# EAGLE board CS8412_TDA1543 (EAGLE 9.6.2)
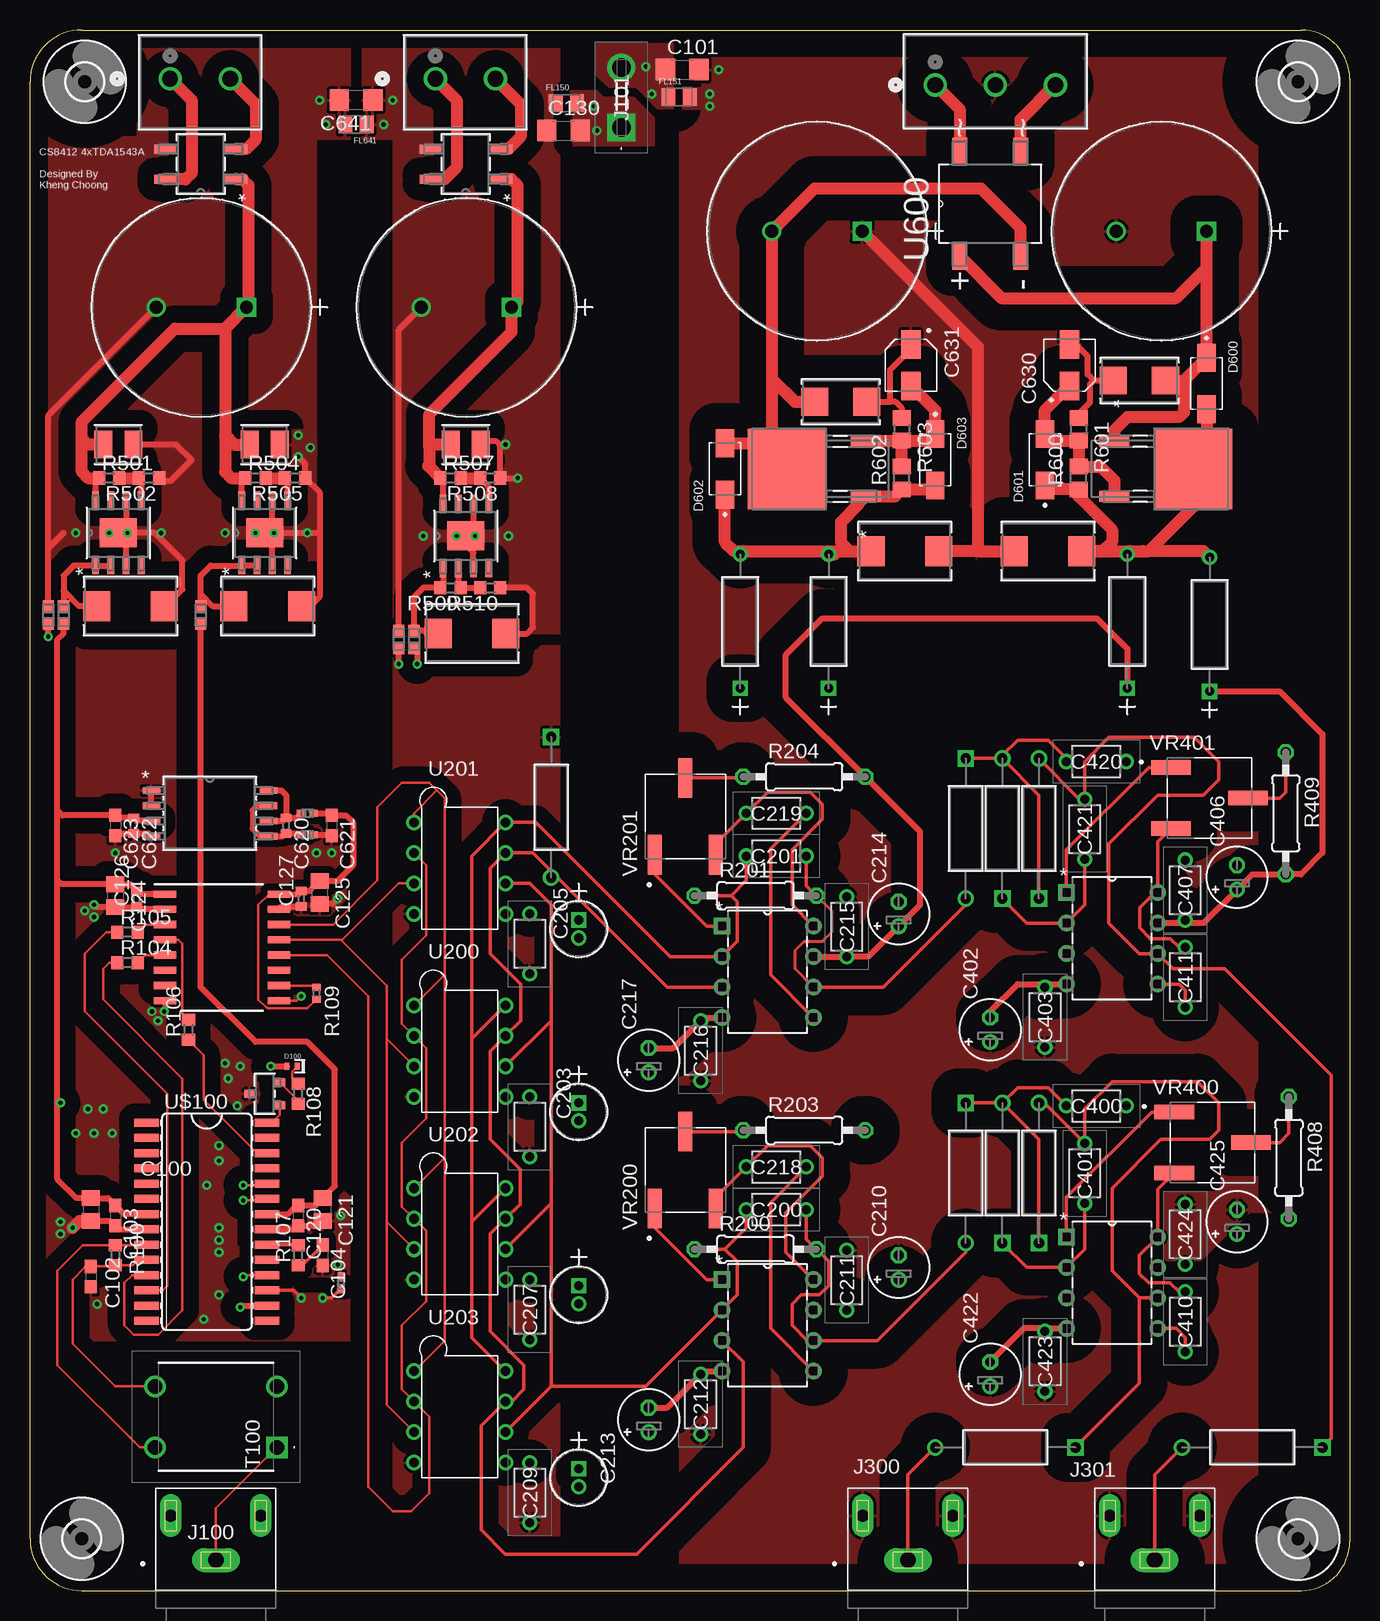
[diagram p0: board, top side]
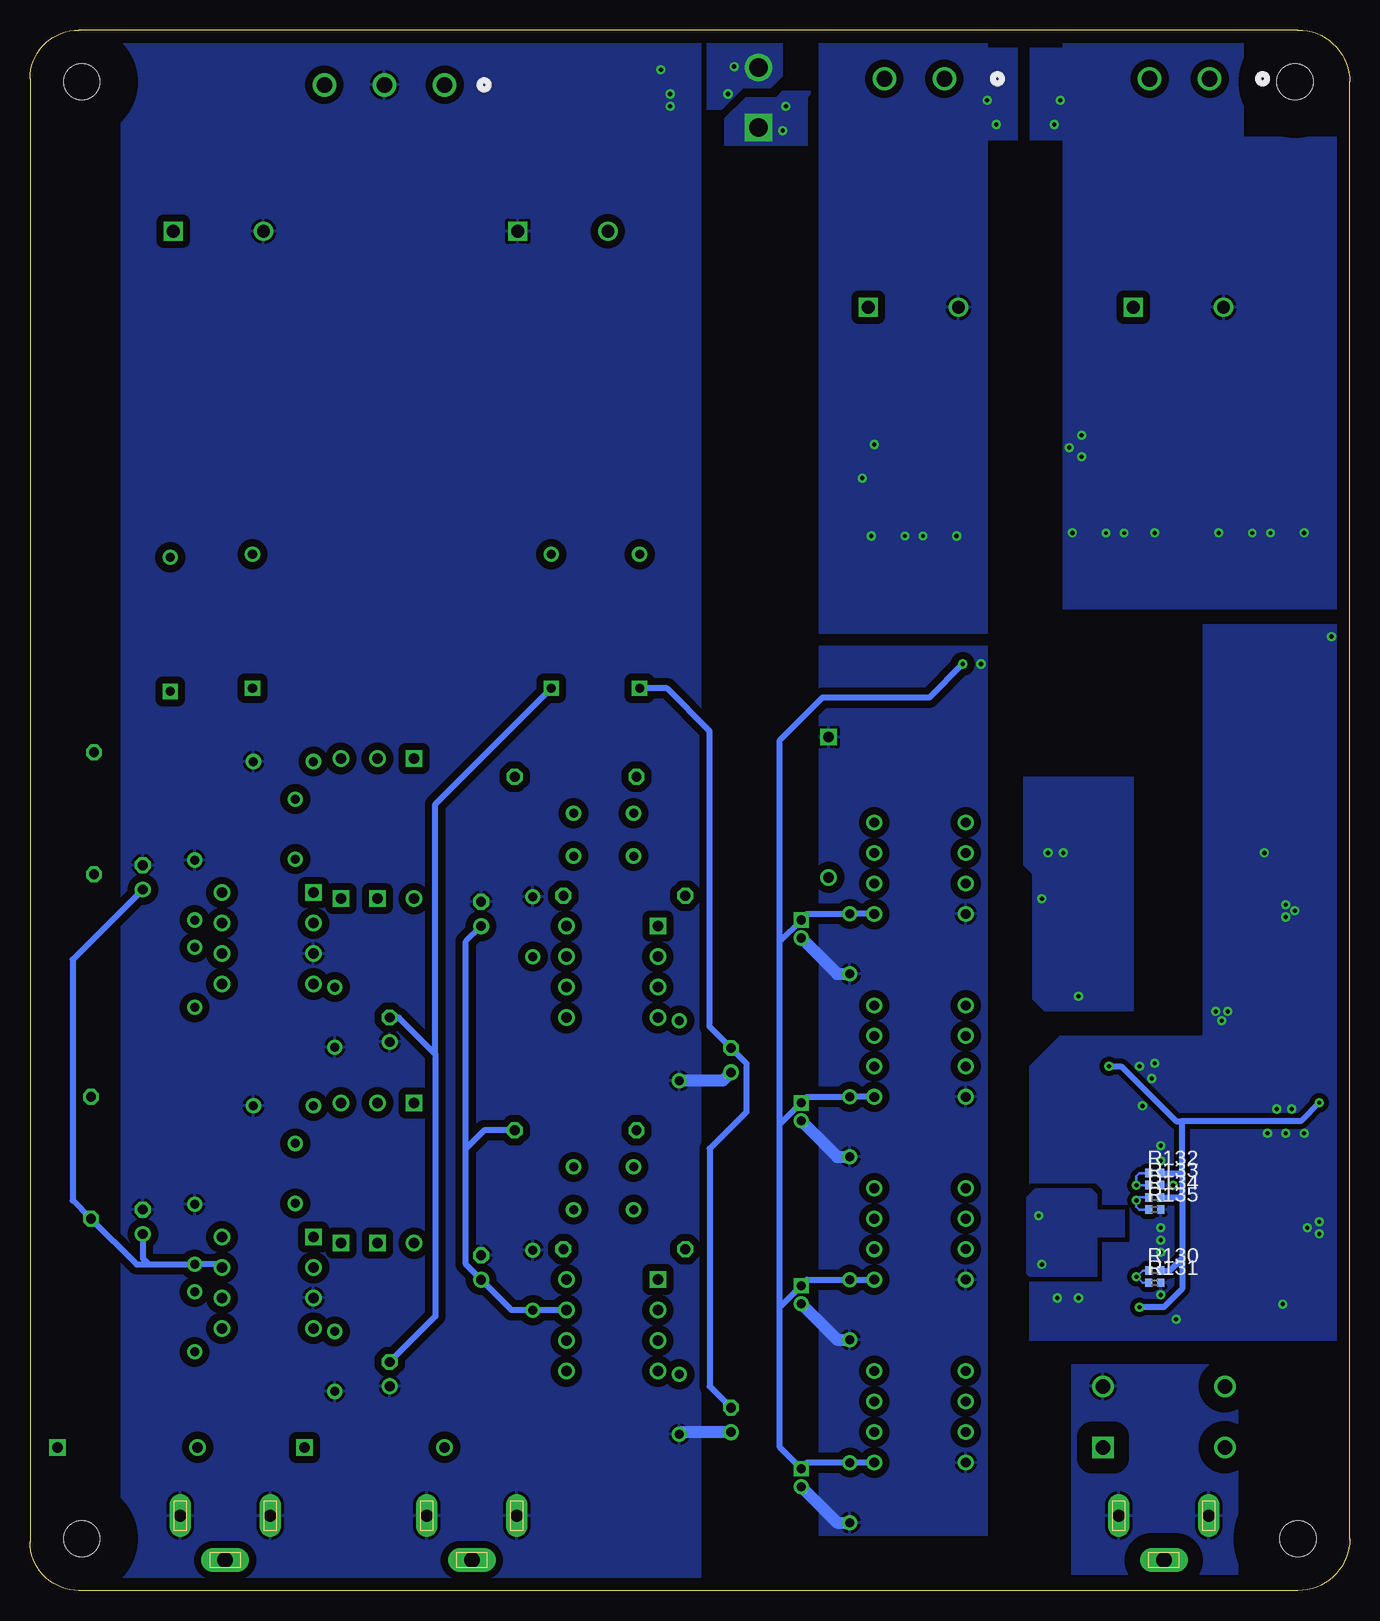
[diagram p1: board, bottom side, seen from below]

Size 109.98 x 130.05 mm. Coordinates in mm from the lower left corner, seen from the top.
Outline: 0,4.32 arc90 4.32,0 105.92,0 arc90 109.98,4.06 109.98,125.98 arc90 105.92,130.05 4.32,130.05 arc90 0,125.73 0,4.32
Copper layers (1*16): Top 0.035mm / dielectric 1.5mm / Bottom 0.035mm
Design rules "default *": minimum track width 6mil, minimum drill 0.35mm, track to track 6mil, track to pad 6mil, pad to pad 6mil, via to via 6mil, smd to smd 6mil, copper to edge 40mil, drill to drill 6mil, minimum pad ring 10mil, minimum via ring 8mil, stop-mask expansion 4mil, vias tented up to drill 13mil, thermal gap 10mil
Net classes: 1 Diff_Pair: width 0.406 mm

## Footprints (pad centres in the part's own frame; a part is rotated, then mirrored left to right if it is on the bottom)
C0805 = smd 1.3 x 1.5: 1 -0.95,0; 2 0.95,0
C1206 = smd 1.6 x 1.8: 1 -1.4,0; 2 1.4,0
C0603 = smd 1.1 x 1: 1 -0.85,0; 2 0.85,0
C0402 = smd 0.7 x 0.9: 1 -0.65,0; 2 0.65,0
K104K15X7RF5TH5 = drill 0.75 pad 1.2: 1 0,0; 2 5,0
CAP_PAN_4X7_PAN = drill 0.762 pad 1.27 square: 1 0,0 | drill 0.762 pad 1.27: 2 1.499,0
E2-5 = drill 0.813 pad 1.27: + -1.016,0 | drill 0.813 pad 1.27 octagon: - 1.016,0
PCAP_18X355_PAN = drill 1.067 pad 1.524 square: 1 0,0 | drill 1.067 pad 1.524: 2 7.518,0
CAP_293D-B_VSS = smd 1.498 x 2.311: 1 -1.258,0; 2 1.258,0
CAP_7343-43_TR3 = smd 2.261 x 2.489: 1 -2.819,0; 2 2.819,0
CAP_293D-C_VSS = smd 2.261 x 2.311: 1 -2.172,0; 2 2.172,0
CAPAE430X550N = smd 2.36 x 1.62: 1 -1.725,0; 2 1.725,0
0402(POL) = smd 0.399 x 0.6: 1 -0.435,0; 2 0.435,0
DIOM5226X220N = smd 2.31 x 1.54: 1 -2.145,0; 2 2.145,0
BEADC2012X105N = smd 1.14 x 1.47: 1 -0.89,0; 2 0.89,0
3,0 = hole 3: 0,0
SWITCHCRAFT_PJRAN1X1U01X = drill 1.3 pad 2 long: 1 0,0 | drill 1 pad 1.8 long: 2 -3.75,3.7; 3 3.75,3.7
23765952 = drill 1.55 pad 2.325 square: 1 0,0 | drill 1.55 pad 2.325: 2 5,0
CONN2_710002_WRE = drill 1.295 pad 1.803: 1 0,0; 2 5.004,0
CONN3_WR-TBL-1377_WRE = drill 1.295 pad 1.803: 1 0,0; 2 5.004,0; 3 10.008,0
IND_BLM15_0402_MUR = smd 0.711 x 0.559: 1 -0.521,0; 2 0.521,0
IND_BLM18_0603_MUR = smd 0.965 x 0.94: 1 -0.749,0; 2 0.749,0
IND_BOURNS_78F = drill 0.762 pad 1.27 square: 1 0,0 | drill 0.762 pad 1.27: 2 11.176,0
R0603 = smd 1 x 1.1: 1 -0.85,0; 2 0.85,0
R0402 = smd 0.6 x 0.7: 1 -0.5,0; 2 0.5,0
0207/10 = drill 0.813 octagon: 1 -5.08,0; 2 5.08,0
YAG_MF25_YAG = drill 0.864 pad 1.372 square: 1 0,0 | drill 0.864 pad 1.372: 2 11.684,0
R0805 = smd 1.3 x 1.5: 1 -0.95,0; 2 0.95,0
DA102C = drill 1.2 pad 1.8 square: 1 0,0 | drill 1.2 pad 1.8: 3 0,-5.08; 4 10.16,-5.08; 6 10.16,0
DW0016B_N = smd 1.9 x 0.6: 1 -4.75,4.445; 2 -4.75,3.175; 3 -4.75,1.905; 4 -4.75,0.635; 5 -4.75,-0.635; 6 -4.75,-1.905; 7 -4.75,-3.175; 8 -4.75,-4.445; 9 4.75,-4.445; 10 4.75,-3.175; 11 4.75,-1.905; 12 4.75,-0.635; 13 4.75,0.635; 14 4.75,1.905; 15 4.75,3.175; 16 4.75,4.445
SOT_BT3906_ONS = smd 0.66 x 0.914: 1 -0.95,-1.245; 2 0.95,-1.245; 3 0,1.245
DIP-8(300MIL)(2.54MM) = drill 0.8: 1 -3.81,-3.81; 2 -1.27,-3.81; 3 1.27,-3.81; 4 3.81,-3.81; 5 3.81,3.81; 6 1.27,3.81; 7 -1.27,3.81; 8 -3.81,3.81
P8 = drill 0.864 pad 1.372 square: 1 -7.62,7.62 | drill 0.864 pad 1.372: 2 -7.62,5.08; 3 -7.62,2.54; 4 -7.62,0; 5 0,0; 6 0,2.54; 7 0,5.08; 8 0,7.62
TO-269AA_3P8X4P75_DIO = smd 1.803 x 0.762: 1 -2.959,1.25; 2 -2.959,-1.25; 3 2.959,-1.25; 4 2.959,1.25
RD_8_2_ADI = smd 1.46 x 0.559: 1 -2.724,1.905; 2 -2.724,0.635; 3 -2.724,-0.635; 4 -2.724,-1.905; 5 2.724,-1.905; 6 2.724,-0.635; 7 2.724,0.635; 8 2.724,1.905 | smd 2.413 x 3.099: EPAD 0,0
SOT508P985X260-4N = smd 2.235 x 1.245: 1 -4.394,2.54; 2 -4.394,-2.54; 3 4.394,-2.54; 4 4.394,2.54
KVU3 = smd 0.94 x 2.489: 1 -2.286,-6.413; 3 2.286,-6.413 | smd 6.706 x 6.528: 2 0,0.152
RI_8_1_ADI = smd 1.461 x 0.561: 1 -4.88,1.905; 2 -4.88,0.635; 3 -4.88,-0.635; 4 -4.88,-1.905; 5 4.88,-1.905; 6 4.88,-0.635; 7 4.88,0.635; 8 4.88,1.905
SO28L = smd 0.66 x 2.032: 1 -8.255,-5.029; 2 -6.985,-5.029; 3 -5.715,-5.029; 4 -4.445,-5.029; 5 -3.175,-5.029; 6 -1.905,-5.029; 7 -0.635,-5.029; 8 0.635,-5.029; 9 1.905,-5.029; 10 3.175,-5.029; 11 4.445,-5.029; 12 5.715,-5.029; 13 6.985,-5.029; 14 8.255,-5.029; 15 8.255,5.029; 16 6.985,5.029; 17 5.715,5.029; 18 4.445,5.029; 19 3.175,5.029; 20 1.905,5.029; 21 0.635,5.029; 22 -0.635,5.029; 23 -1.905,5.029; 24 -3.175,5.029; 25 -4.445,5.029; 26 -5.715,5.029; 27 -6.985,5.029; 28 -8.255,5.029
TRIM_3361P-1-104GLF = smd 3.3 x 1.19: 1 -3.2,2.54; 2 3.2,0; 3 -3.2,-2.54

## Placement (x,y rotation side)
C100  10uF  [C0805]  5.08,31.75 270 top
C101  [C1206]  54.36,126.75 0 top
C102  10nF  [C0603]  5.08,26.16 270 top
C103  0.1uF  [C0603]  7.11,31.24 270 top
C104  47nF  [C0603]  24.38,27.94 270 top
C120  0.1uF  [C0603]  22.35,31.24 270 top
C121  10uF  [C0805]  24.38,31.75 270 top
C124  10uF  [C0805]  7.11,57.91 270 top
C125  10uF  [C0805]  24.13,58.17 270 top
C126  CC0402KRX7R8BB104  [C0402]  8.89,57.66 90 top
C127  CC0402KRX7R8BB104  [C0402]  22.61,57.66 90 top
C130  [C1206]  44.45,121.67 0 top
C200  K104K15X7RF5TH5  [K104K15X7RF5TH5]  59.69,31.75 0 top
C201  K104K15X7RF5TH5  [K104K15X7RF5TH5]  59.69,61.21 0 top
C202  EEAGA1C100H  [CAP_PAN_4X7_PAN]  45.72,40.64 270 top
C203  K104K15X7RF5TH5  [K104K15X7RF5TH5]  41.66,41.15 270 top
C204  EEAGA1C100H  [CAP_PAN_4X7_PAN]  45.72,55.88 270 top
C205  K104K15X7RF5TH5  [K104K15X7RF5TH5]  41.66,56.39 270 top
C206  EEAGA1C100H  [CAP_PAN_4X7_PAN]  45.72,10.16 270 top
C207  K104K15X7RF5TH5  [K104K15X7RF5TH5]  41.66,25.91 270 top
C208  EEAGA1C100H  [CAP_PAN_4X7_PAN]  45.72,25.4 270 top
C209  K104K15X7RF5TH5  [K104K15X7RF5TH5]  41.66,10.67 270 top
C210  860020572003  [E2-5]  72.39,26.92 90 top
C211  K104K15X7RF5TH5  [K104K15X7RF5TH5]  68.07,23.37 90 top
C212  K104K15X7RF5TH5  [K104K15X7RF5TH5]  55.88,18.03 270 top
C213  860020572003  [E2-5]  51.56,14.22 90 top
C214  860020572003  [E2-5]  72.39,56.39 90 top
C215  K104K15X7RF5TH5  [K104K15X7RF5TH5]  68.07,52.83 90 top
C216  K104K15X7RF5TH5  [K104K15X7RF5TH5]  55.88,47.5 270 top
C217  860020572003  [E2-5]  51.56,44.2 90 top
C218  K104K15X7RF5TH5  [K104K15X7RF5TH5]  59.69,35.31 0 top
C219  K104K15X7RF5TH5  [K104K15X7RF5TH5]  59.69,64.77 0 top
C400  K104K15X7RF5TH5  [K104K15X7RF5TH5]  86.36,40.39 0 top
C401  K104K15X7RF5TH5  [K104K15X7RF5TH5]  87.88,32.26 90 top
C402  860020572003  [E2-5]  80.01,46.74 90 top
C403  K104K15X7RF5TH5  [K104K15X7RF5TH5]  84.58,50.29 270 top
C406  860020572003  [E2-5]  100.58,59.44 90 top
C407  K104K15X7RF5TH5  [K104K15X7RF5TH5]  96.27,55.88 90 top
C410  K104K15X7RF5TH5  [K104K15X7RF5TH5]  96.27,24.89 270 top
C411  K104K15X7RF5TH5  [K104K15X7RF5TH5]  96.27,53.59 270 top
C420  K104K15X7RF5TH5  [K104K15X7RF5TH5]  86.36,69.09 0 top
C421  K104K15X7RF5TH5  [K104K15X7RF5TH5]  87.88,60.96 90 top
C422  860020572003  [E2-5]  80.01,18.03 90 top
C423  K104K15X7RF5TH5  [K104K15X7RF5TH5]  84.58,21.59 270 top
C424  K104K15X7RF5TH5  [K104K15X7RF5TH5]  96.27,27.18 90 top
C425  860020572003  [E2-5]  100.58,30.73 90 top
C500  ECA-1VM472  [PCAP_18X355_PAN]  18.03,106.93 180 top
C501  293D225X0035B2TE3  [CAP_293D-B_VSS]  19.56,95.5 0 top
C503  TR3E226K035C0200  [CAP_7343-43_TR3]  8.38,82.04 0 top
C504  293D225X0035B2TE3  [CAP_293D-B_VSS]  7.37,95.5 0 top
C505  TR3E226K035C0200  [CAP_7343-43_TR3]  19.81,82.04 0 top
C506  ECA-1VM472  [PCAP_18X355_PAN]  40.13,106.93 180 top
C507  293D225X0035B2TE3  [CAP_293D-B_VSS]  36.32,95.5 0 top
C508  TR3E226K035C0200  [CAP_7343-43_TR3]  36.83,79.76 0 top
C600  ECA-1HM332  [PCAP_18X355_PAN]  98.04,113.28 180 top
C601  ECA-1HM332  [PCAP_18X355_PAN]  69.34,113.28 180 top
C602  293D225X0050C2TE3  [CAP_293D-C_VSS]  92.46,100.84 180 top
C603  293D225X0050C2TE3  [CAP_293D-C_VSS]  67.56,99.06 180 top
C604  TR3E226K035C0200  [CAP_7343-43_TR3]  84.84,86.61 180 top
C605  TR3E226K035C0200  [CAP_7343-43_TR3]  72.9,86.61 180 top
C620  0.1uF  [C0402]  21.34,63.75 270 top
C621  10uF  [C0603]  25.15,63.75 270 top
C622  0.1uF  [C0402]  8.64,63.75 270 top
C623  10uF  [C0603]  7.11,63.75 270 top
C630  UWT1C100MCL1GB  [CAPAE430X550N]  86.61,102.11 90 top
C631  UWT1C100MCL1GB  [CAPAE430X550N]  73.41,102.11 270 top
C641  [C1206]  27.18,124.21 180 top
D100  LTST-C281KRKT  [0402(POL)]  21.84,43.69 180 top
D600  MRA4007T3G  [DIOM5226X220N]  98.04,100.58 270 top
D601  MRA4007T3G  [DIOM5226X220N]  84.58,94.23 90 top
D602  MRA4007T3G  [DIOM5226X220N]  57.91,93.47 90 top
D603  MRA4007T3G  [DIOM5226X220N]  75.44,94.23 270 top
FL150  BLM21PG121SN1D  [BEADC2012X105N]  44.7,123.95 0 top
FL151  BLM21PG121SN1D  [BEADC2012X105N]  54.1,124.46 0 top
FL641  BLM21PG121SN1D  [BEADC2012X105N]  27.18,122.17 180 top
H100  MOUNT-HOLE3.0  [3,0]  105.66,4.32 0 top
H101  MOUNT-HOLE3.0  [3,0]  4.32,4.32 0 top
H102  MOUNT-HOLE3.0  [3,0]  105.66,125.73 0 top
H103  MOUNT-HOLE3.0  [3,0]  4.57,125.73 0 top
J100  PJRAN1X1U01X  [SWITCHCRAFT_PJRAN1X1U01X]  15.49,2.54 0 top
J101  2376595-2  [23765952]  49.28,121.92 90 top
J300  PJRAN1X1U01X  [SWITCHCRAFT_PJRAN1X1U01X]  73.15,2.54 0 top
J301  PJRAN1X1U01X  [SWITCHCRAFT_PJRAN1X1U01X]  93.73,2.54 0 top
J500  691137710002  [CONN2_710002_WRE]  11.68,125.98 0 top
J501  691137710002  [CONN2_710002_WRE]  33.78,125.98 0 top
J600  691137710003  [CONN3_WR-TBL-1377_WRE]  75.44,125.48 0 top
L103  BLM15AG700SN1D  [IND_BLM15_0402_MUR]  25.91,25.65 90 top
L500  BLM18PG121SN1D  [IND_BLM18_0603_MUR]  2.79,81.28 90 top
L501  BLM18PG121SN1D  [IND_BLM18_0603_MUR]  14.22,81.28 90 top
L502  BLM18PG121SN1D  [IND_BLM18_0603_MUR]  32,79.25 90 top
L503  BLM18PG121SN1D  [IND_BLM18_0603_MUR]  1.52,81.28 90 top
L504  BLM18PG121SN1D  [IND_BLM18_0603_MUR]  30.73,79.25 90 top
L600  78F1R0K-RC  [IND_BOURNS_78F]  98.3,74.93 90 top
L601  78F1R0K-RC  [IND_BOURNS_78F]  91.44,75.18 90 top
L602  BLM15HD182SN1D  [IND_BLM15_0402_MUR]  23.11,64.77 0 top
L603  BLM15HD182SN1D  [IND_BLM15_0402_MUR]  23.11,62.99 0 top
L605  78F1R0K-RC  [IND_BOURNS_78F]  66.55,75.18 90 top
L606  78F1R0K-RC  [IND_BOURNS_78F]  59.18,75.18 90 top
R100  75R  [R0603]  7.11,27.94 90 top
R104  22R  [R0603]  8.13,52.32 0 top
R105  22R  [R0603]  8.13,54.86 0 top
R106  22R  [R0603]  13.21,46.74 90 top
R107  1K  [R0603]  22.35,27.94 90 top
R108  680R  [R0603]  22.35,41.4 270 top
R109  1K  [R0402]  23.88,49.78 270 top
R130  0R  [R0402]  16.26,26.67 0 bottom
R131  0R  [R0402]  16.26,25.65 0 bottom
R132  0R  [R0402]  16.26,34.8 0 bottom
R133  0R  [R0402]  16.26,33.78 0 bottom
R134  0R  [R0402]  16.26,32.77 0 bottom
R135  0R  [R0402]  16.26,31.75 0 bottom
R200  1K5  [0207/10]  60.45,28.45 0 top
R201  1K5  [0207/10]  60.45,57.91 0 top
R202  MFP-25BRD52-10K  [YAG_MF25_YAG]  43.43,71.12 270 top
R203  20K  [0207/10]  64.52,38.35 0 top
R204  20K  [0207/10]  64.52,67.82 0 top
R400  MFP-25BRD52-10K  [YAG_MF25_YAG]  77.98,40.64 270 top
R401  MFP-25BRD52-10K  [YAG_MF25_YAG]  81.03,28.96 90 top
R402  MFP-25BRD52-10K  [YAG_MF25_YAG]  84.07,28.96 90 top
R403  MFP-25BRD52-10K  [YAG_MF25_YAG]  87.12,11.94 180 top
R407  MFP-25BRD52-10K  [YAG_MF25_YAG]  107.7,11.94 180 top
R408  20K  [0207/10]  104.9,36.07 270 top
R409  20K  [0207/10]  104.65,64.77 270 top
R411  MFP-25BRD52-10K  [YAG_MF25_YAG]  77.98,69.34 270 top
R412  MFP-25BRD52-10K  [YAG_MF25_YAG]  81.03,57.66 90 top
R413  MFP-25BRD52-10K  [YAG_MF25_YAG]  84.07,57.66 90 top
R501  100k  [R0603]  6.6,92.71 0 top
R502  100k  [R0603]  9.91,92.71 180 top
R504  100k  [R0603]  18.8,92.71 0 top
R505  100k  [R0603]  22.1,92.71 180 top
R507  100k  [R0603]  35.05,92.71 0 top
R508  100k  [R0603]  38.35,92.71 180 top
R509  100k  [R0603]  35.05,83.57 180 top
R510  100k  [R0603]  38.35,83.57 180 top
R600  RC0805FR-07240RL  [R0805]  87.38,92.71 90 top
R601  RC0805FR-072K05L  [R0805]  87.38,96.77 270 top
R602  RC0805FR-07120RL  [R0805]  72.64,92.71 90 top
R603  RC0805FR-071K02L  [R0805]  72.64,96.77 270 top
T100  DA102C  [DA102C]  20.57,11.94 180 top
U1  ISO7740FDWR  [DW0016B_N]  16,53.59 0 top
U101  MMBT3906  [SOT_BT3906_ONS]  19.56,41.4 90 top
U200  TDA1543  [DIP-8(300MIL)(2.54MM)]  35.81,44.96 270 top
U201  TDA1543  [DIP-8(300MIL)(2.54MM)]  35.81,60.2 270 top
U202  TDA1543  [DIP-8(300MIL)(2.54MM)]  35.81,29.72 270 top
U203  TDA1543  [DIP-8(300MIL)(2.54MM)]  35.81,14.48 270 top
U205  NE5534P  [P8]  65.28,18.29 0 top
U206  NE5534P  [P8]  65.28,47.75 0 top
U300  NE5534P  [P8]  93.98,21.84 0 top
U301  NE5534P  [P8]  93.98,50.55 0 top
U500  MB10S-13  [TO-269AA_3P8X4P75_DIO]  14.22,118.87 180 top
U501  ADP7104ARDZ-5.0-R7  [RD_8_2_ADI]  7.37,88.14 90 top
U502  ADP7104ARDZ-5.0-R7  [RD_8_2_ADI]  19.56,88.14 90 top
U503  MB10S-13  [TO-269AA_3P8X4P75_DIO]  36.32,118.87 180 top
U504  ADP7104ARDZ-R7  [RD_8_2_ADI]  36.32,87.88 90 top
U600  DF04S  [SOT508P985X260-4N]  80.01,115.57 90 top
U601  LM317MKVURG3  [KVU3]  96.77,93.47 270 top
U602  LM337KVURG3  [KVU3]  63.25,93.47 90 top
U603  ADUM6028-5BRIZ  [RI_8_1_ADI]  14.99,64.77 0 top
U$100  CS8412SOIC  [SO28L]  14.73,30.73 270 top
VR200  3361P-1-104GLF  [TRIM_3361P-1-104GLF]  54.61,35.05 90 top
VR201  3361P-1-104GLF  [TRIM_3361P-1-104GLF]  54.61,64.52 90 top
VR400  3361P-1-104GLF  [TRIM_3361P-1-104GLF]  98.55,37.34 0 top
VR401  3361P-1-104GLF  [TRIM_3361P-1-104GLF]  98.3,66.04 0 top

## Library data of the parts
C100-C104 C120 C121 C124-C127 C130 C210 C213 C214 C217 C402 C406 C422 C425 C620-C623 C641 = rcl; SPICEPREFIX: C
C200 C201 C203 C205 C207 C209 C211 C212 C215 C216 C218 C219 C400 C401 C403 C407 C410 C411 C420 C421 C423 C424 = K104K15X7RF5TH5; DESCRIPTION: Vishay K104K15X7RF5TH5 100nF Multilayer Ceramic Capacitor MLCC 50V dc +/-10% Tolerance Through Hole; HEIGHT: 6.6mm; MANUFACTURER_NAME: Vishay; MANUFACTURER_PART_NUMBER: K104K15X7RF5TH5; MOUSER_PART_NUMBER: 594-K104K15X7RF5TH5; MOUSER_PRICE-STOCK: https://www.mouser.co.uk/ProductDetail/Vishay-BC-Components/K104K15X7RF5TH5?qs=CuWZN%2F5Vbiofhf%252BuZNGw%2Fg%3D%3D
C202 C204 C206 C208 = EEAGA1C100H; COPYRIGHT: Copyright (C) 2024 Ultra Librarian. All rights reserved.; MANUFACTURER_PART_NUMBER: EEAGA1C100H; MFR_NAME: Panasonic
C500 C506 = ECA_1VM472; COPYRIGHT: Copyright (C) 2024 Ultra Librarian. All rights reserved.; MANUFACTURER_PART_NUMBER: ECA-1VM472; MFR_NAME: Panasonic
C501 C504 C507 = 293D225X0035B2TE3; COPYRIGHT: Copyright (C) 2024 Ultra Librarian. All rights reserved.; MANUFACTURER_PART_NUMBER: 293D225X0035B2TE3; MFR_NAME: Vishay
C503 C505 C508 C604 C605 = TR3E226K035C0200; COPYRIGHT: Copyright (C) 2024 Ultra Librarian. All rights reserved.; MANUFACTURER_PART_NUMBER: TR3E226K035C0200; MFR_NAME: Vishay
C600 C601 = ECA_1HM332; COPYRIGHT: Copyright (C) 2024 Ultra Librarian. All rights reserved.; MANUFACTURER_PART_NUMBER: ECA-1HM332; MFR_NAME: Panasonic
C602 C603 = 293D225X0050C2TE3; COPYRIGHT: Copyright (C) 2024 Ultra Librarian. All rights reserved.; MANUFACTURER_PART_NUMBER: 293D225X0050C2TE3; MFR_NAME: Vishay
C630 C631 = UWT1C100MCL1GB; MANUFACTURER: Nichicon; MAXIMUM_PACKAGE_HEIGHT: 5.50 mm; PARTREV: CAT.8100L; STANDARD: IPC 7351B
D100 = LTST-C281KRKT; AVAILABILITY: In Stock; CHECK_PRICES: https://www.snapeda.com/parts/LTST-C281KRKT/Lite-On/view-part/?ref=eda; DESCRIPTION: Red 631nm LED Indication - Discrete 2V 0402 (1005 Metric); MF: Lite-On; MP: LTST-C281KRKT; PACKAGE: 0402 Lite-On; PRICE: None; SNAPEDA_LINK: https://www.snapeda.com/parts/LTST-C281KRKT/Lite-On/view-part/?ref=snap
D600-D603 = MRA4007T3G; MANUFACTURER: ON SEMICONDUCTOR; MAXIMUM_PACKAGE_HEIGHT: 2.2 mm; PARTREV: 10/22/2021; STANDARD: IPC-7351B
FL150 FL151 FL641 = BLM21PG121SN1D
H100-H103 = holes
J100 J300 J301 = PJRAN1X1U01X; MANUFACTURER: Switchcraft; MAXIMUM_PACKAGE_HIEGHT: 13mm; PARTREV: A; STANDARD: Manufacturer Recommendations
J101 = 2376595-2; ARROW_PART_NUMBER: 2376595-2; ARROW_PRICE-STOCK: https://www.arrow.com/en/products/2376595-2/te-connectivity?region=nac; DESCRIPTION: Contact Features: Contact Mating Area Plating Material Thickness 4 MICM | Terminal Orientation Straight | Contact Underplating Material Thickness 1.3 MICM | PCB Contact Termination Area Plating Material Thickness 4 MICM | Mating Tab Thickness .8 MM | Contact Underplating Material Nickel | Contact Mating Area Plating Material Thickness 157.48 MICIN | Mating Tab Width 6.35 MM | Terminal Size 6.35 | Mating Tab Thickness .032 INCH | Mating Tab Width .25 INCH | PCB Terminal Type Tab | Terminal Plating Material T; HEIGHT: 10.65mm; MANUFACTURER_NAME: TE Connectivity; MANUFACTURER_PART_NUMBER: 2376595-2; MOUSER_PART_NUMBER: 571-2376595-2; MOUSER_PRICE-STOCK: https://www.mouser.co.uk/ProductDetail/TE-Connectivity/2376595-2?qs=A6eO%252BMLsxmTtAfwrSC%2FSrg%3D%3D
J500 J501 = 691137710002; COPYRIGHT: Copyright (C) 2024 Ultra Librarian. All rights reserved.; MANUFACTURER_PART_NUMBER: 691137710002; MFR_NAME: Wurth Electronics
J600 = 691137710003; COPYRIGHT: Copyright (C) 2024 Ultra Librarian. All rights reserved.; MANUFACTURER_PART_NUMBER: 691137710003; MFR_NAME: Wurth Electronics; TYPE: Wire to Board
L103 = BLM15AG700SN1D; COPYRIGHT: Copyright (C) 2024 Ultra Librarian. All rights reserved.; MANUFACTURER_PART_NUMBER: BLM15AG700SN1D; MFR_NAME: Murata
L500-L504 = BLM18PG121SN1D; COPYRIGHT: Copyright (C) 2024 Ultra Librarian. All rights reserved.; MANUFACTURER_PART_NUMBER: BLM18PG121SN1D; MFR_NAME: Murata
L600 L601 L605 L606 = 78F1R0K_RC; COPYRIGHT: Copyright (C) 2024 Ultra Librarian. All rights reserved.; MANUFACTURER_PART_NUMBER: 78F1R0K-RC; MFR_NAME: Bourns Electronics
L602 L603 = BLM15HD182SN1D; COPYRIGHT: Copyright (C) 2024 Ultra Librarian. All rights reserved.; MANUFACTURER_PART_NUMBER: BLM15HD182SN1D; MFR_NAME: Murata
R100 R104-R109 R130-R135 R200 R201 R203 R204 R408 R409 R501 R502 R504 R505 R507-R510 R600-R603 = rcl; SPICEPREFIX: R
R202 R400-R403 R407 R411-R413 = MFP_25BRD52_10K; COPYRIGHT: Copyright (C) 2024 Ultra Librarian. All rights reserved.; MANUFACTURER_PART_NUMBER: MFP-25BRD52-10K; MFR_NAME: Yageo
T100 = DA102C; ARROW_PART_NUMBER: DA102C; ARROW_PRICE-STOCK: https://www.arrow.com/en/products/da102c/murata-power-solutions?region=nac; DESCRIPTION: Through Hole Audio Transformer; HEIGHT: 6.6mm; MANUFACTURER_NAME: Murata Electronics; MANUFACTURER_PART_NUMBER: DA102C; MOUSER_PART_NUMBER: 580-DA102C; MOUSER_PRICE-STOCK: https://www.mouser.co.uk/ProductDetail/Murata-Power-Solutions/DA102C?qs=h7KbnC2lZSYWJXuqlteIuw%3D%3D
U1 = ISO7740FDWR; COPYRIGHT: Copyright (C) 2024 Ultra Librarian. All rights reserved.; MANUFACTURER_PART_NUMBER: ISO7740FDWR; MFR_NAME: Texas Instruments; REFDES: RefDes; TYPE: TYPE
U101 = MMBT3906; COPYRIGHT: Copyright (C) 2024 Ultra Librarian. All rights reserved.; MANUFACTURER_PART_NUMBER: MMBT3906; MFR_NAME: onsemi
U200-U203 = TDA1543; AVAILABILITY: In Stock; CHECK_PRICES: https://www.snapeda.com/parts/TDA1543/NXP+Semiconductors/view-part/?ref=eda; DESCRIPTION: Dual 16-bit DAC economy version I2S input format; MF: NXP; MP: TDA1543; PACKAGE: None; PRICE: None; SNAPEDA_LINK: https://www.snapeda.com/parts/TDA1543/NXP+Semiconductors/view-part/?ref=snap
U205 U206 U300 U301 = NE5534P; COPYRIGHT: Copyright (C) 2024 Ultra Librarian. All rights reserved.; MANUFACTURER_PART_NUMBER: NE5534P; MFR_NAME: Texas Instruments
U500 U503 = MB10S_13; COPYRIGHT: Copyright (C) 2024 Ultra Librarian. All rights reserved.; MANUFACTURER_PART_NUMBER: MB10S-13; MFR_NAME: Diodes Inc
U501 U502 = ADP7104ARDZ_5_0_R7; COPYRIGHT: Copyright (C) 2024 Ultra Librarian. All rights reserved.; MANUFACTURER_PART_NUMBER: ADP7104ARDZ-5.0-R7; MFR_NAME: Analog Devices Inc
U504 = ADP7104ARDZ_R7; COPYRIGHT: Copyright (C) 2024 Ultra Librarian. All rights reserved.; MANUFACTURER_PART_NUMBER: ADP7104ARDZ-R7; MFR_NAME: Analog Devices Inc
U600 = DF04S; MPN: DF04S; OC_FARNELL: 1467469; OC_NEWARK: 18C6124; PACKAGE: SDIP-4; SUPPLIER: Fairchild
U601 = LM317MKVURG3; COPYRIGHT: Copyright (C) 2024 Ultra Librarian. All rights reserved.; MANUFACTURER_PART_NUMBER: LM317MKVURG3; MFR_NAME: Texas Instruments
U602 = LM337KVURG3; COPYRIGHT: Copyright (C) 2024 Ultra Librarian. All rights reserved.; MANUFACTURER_PART_NUMBER: LM337KVURG3; MFR_NAME: Texas Instruments
U603 = ADUM6028; COPYRIGHT: Copyright (C) 2024 Ultra Librarian. All rights reserved.; MANUFACTURER_PART_NUMBER: ADUM6028-5BRIZ; MFR_NAME: Analog Devices Inc
U$100 = cirrus-dar
VR200 VR201 VR400 VR401 = 3361P-1-104GLF; MANUFACTURER: Bourns; MAXIMUM_PACKAGE_HEIGHT: 5.84mm; PARTREV: 08/19; STANDARD: Manufacturer Recommendations

## Nets
5V_ISO: C125.1 C127.2 C621.1 L602.2 R109.2 U1.16
5V_RX: C503.1 L500.2 U501.1 U501.2
+12: C604.1 D600.2 D601.1 L600.2 L601.2 R600.1 U601.2
-12: C605.2 D602.1 D603.2 L605.2 L606.2 R602.1 U602.1
AGND: C101.2 C210.- C211.2 C212.2 C213.+ C214.- C215.2 C216.2 C217.+ C400.2 C402.+ C403.2 C406.- C407.2 C420.2 C422.+ C423.2 C424.2 C425.- C600.2 C601.1 C602.2 C603.1 C604.2 C605.1 C630.2 C631.1 FL151.2 J300.2 J300.3 J301.2 J301.3 J600.2 R601.1 R603.1 U300.3 U301.3
BAL_LF: U300.1 VR400.1
BAL_LV: U205.1 VR200.1
BAL_RF: U301.1 VR401.1
BAL_RV: U206.1 VR201.1
BCK: R105.2 U1.3
BCK_OUT_ISO: U1.14 U200.1 U201.1 U202.1 U203.1
COM_LF: C410.2 U300.5
COM_LV: C218.2 U205.5
COM_RF: C411.2 U301.5
COM_RV: C219.2 U206.5
COMP/BAL_LF: C410.1 U300.8 VR400.3
COMP/BAL_LV: C218.1 U205.8 VR200.3
COMP/BAL_RF: C411.1 U301.8 VR401.3
COMP/BAL_RV: C219.1 U206.8 VR201.3
DAC: C508.1 L502.2 R509.2 U504.1
DGND_P: C500.2 C501.2 C503.2 C504.2 C505.2 C641.2 FL641.2 L503.2 R502.1 R505.1 U500.3 U501.3 U501.6 U501.EPAD U502.3 U502.6 U502.EPAD
DGND_S: C100.2 C102.2 C103.2 C124.2 C126.1 C622.2 C623.2 L103.1 L503.1 R131.2 R133.2 R135.2 U1.2 U1.8 U101.3 U603.1 U603.2 U603.4 U$100.8 U$100.17
DOUT: R106.2 U1.4
DOUT_OUT_ISO: U1.13 U200.3 U201.3 U202.3 U203.3
FILTER: R107.2 U$100.20
GND_DAC_P: C130.1 C506.2 C507.2 C508.2 C641.1 FL150.1 FL641.1 L504.2 R508.1 R510.1 U503.3 U504.3 U504.6 U504.EPAD
GND_DAC_S: C202.2 C203.2 C204.2 C205.2 C206.2 C207.2 C208.2 C209.2 L504.1 R202.1 U200.4 U201.4 U202.4 U203.4
GND_ISO: C125.2 C127.1 C621.2 L603.2 U1.9 U1.15
GND_VA+: C104.2 C120.2 C121.2 L103.2 U$100.21
LEFT_FIL: C401.2 R402.2 R403.1 U300.6
LRCK: R104.2 U1.5
LRCK_OUT_ISO: U1.12 U200.2 U201.2 U202.2 U203.2
M0: R134.1 R135.1 U$100.23
M1: R132.1 R133.1 U$100.24
M2: R130.1 R131.1 U$100.18
N$1: C104.1 R107.1
N$2: R104.1 U$100.11
N$3: R202.2 U200.7 U201.7 U202.7 U203.7 U205.3 U206.3
N$4: R105.1 U$100.12
N$5: J100.2 J100.3 T100.3
N$6: U101.1 U$100.28
N$7: C600.1 C602.1 D600.1 U600.1 U601.1
N$8: J100.1 T100.1
N$9: R108.2 U101.2
N$10: D100.1 R108.1
N$11: C630.1 D601.2 R600.2 R601.2 U601.3
N$12: C400.1 R400.1 R401.2 R402.1
N$13: C201.1 R201.1 U200.8 U201.8 U202.8 U203.8 U206.2
N$14: C420.1 R411.1 R412.2 R413.1
N$15: J300.1 R403.2
N$16: C200.1 R200.1 U200.6 U201.6 U202.6 U203.6 U205.2
N$17: R109.1 U1.10
N$18: J301.1 R407.2
N$19: J600.1 U600.4
N$20: C620.1 L602.1 U603.6 U603.8
N$21: J600.3 U600.3
N$22: C620.2 L603.1 U603.5 U603.7
N$23: J500.2 U500.2
N$24: J500.1 U500.4
N$25: C500.1 C501.1 C504.1 R501.1 R504.1 U500.1 U501.8 U502.8
N$26: U501.7
N$27: R501.2 R502.2 U501.5
N$28: U504.7
N$29: R504.2 R505.2 U502.5
N$30: J501.2 U503.2
N$31: J501.1 U503.4
N$32: C506.1 C507.1 R507.1 U503.1 U504.8
N$33: C421.1 R412.1 U301.2
N$34: R507.2 R508.2 U504.5
N$35: R509.1 R510.2 U504.2
N$36: C601.2 C603.2 D602.2 U600.2 U602.2
N$37: U502.7
N$38: C101.1 FL151.1 J101.2
N$39: C631.2 D603.1 R602.2 R603.2 U602.3
N$40: C130.2 FL150.2 J101.1
N$42: R203.1 VR200.2
N$43: R204.1 VR201.2
N$44: R408.1 VR400.2
N$45: R409.1 VR401.2
N$46: C401.1 R401.1 U300.2
RIGHT_FIL: C421.2 R407.1 R413.2 U301.6
RXN: C102.1 R100.1 T100.4 U$100.10
RXP: R100.2 T100.6 U$100.9
SDATA_OUT: R106.1 U$100.26
V_LEFT: C200.2 R200.2 R400.2 U205.6
V_RIGHT: C201.2 R201.2 R411.2 U206.6
VA+_5V: C505.1 L501.2 U502.1 U502.2
VA+_5V_RX: C120.1 C121.1 L501.1 U$100.22
VDD+12_FIL: C406.+ C407.1 C424.1 C425.+ L600.1 R408.2 R409.2 U300.7 U301.7
VDD+12_IV: C210.+ C211.1 C214.+ C215.1 L601.1 R203.2 R204.2 U205.7 U206.7
VDD-12_FIL: C402.- C403.1 C422.- C423.1 L605.1 U300.4 U301.4
VDD-12_IV: C212.1 C213.- C216.1 C217.- L606.1 U205.4 U206.4
VDD_5V_RX: C100.1 C103.1 C124.1 C126.2 C622.1 C623.1 D100.2 L500.1 R130.2 R132.2 R134.2 U1.1 U603.3 U$100.7 U$100.16
VDD_DAC: C202.1 C203.1 C204.1 C205.1 C206.1 C207.1 C208.1 C209.1 L502.1 U200.5 U201.5 U202.5 U203.5

## Tracks (layer width: path | path; a pad name or v marks a point on that pad's centre or on a via)
5V_ISO
  Top 0.203: U1.16 19.94,58.04 19.04,57.14 19.04,49.25 19.7,48.59 19.73,48.59 19.81,48.51 23.11,48.51 23.12,48.52 23.12,48.53 R109.2
  Top 0.508: L602.2 24.98,64.77 C621.1 26.33,64.6 26.92,64.01 26.92,60.45 25.59,59.12 C125.1 23.32,58.31 C127.2 22.34,58.04 U1.16
5V_RX
  Top 0.508: U501.2 U501.1 3.63,85.41 2.79,84.58 2.79,83.31 | 2.79,83.31 L500.2 | C503.1 4.06,82.04 2.79,83.31
+12
  Top 1.016: D600.2 98.04,94.59 U601.2 96.93,90.32 93.22,86.61 | D601.1 84.91,91.76 R600.1 87.38,91.19 90.17,88.39 90.17,87.38 89.41,86.61 C604.1 91.69,86.61 | 93.22,86.61 92.71,86.61 91.69,86.61 | L601.2 91.69,86.61 | L600.2 97.79,86.61 93.22,86.61
-12
  Top 1.016: D603.2 75.11,91.76 R602.1 72.07,91.19 U602.1 69,90.53 69,90.47 67.56,89.04 67.56,87.38 68.33,86.61 | 68.33,86.61 C605.2 | D602.1 57.91,87.38 58.67,86.61 59.44,86.61 | 59.44,86.61 67.31,86.61 | 67.31,86.61 68.33,86.61 | L606.2 59.44,86.61 | 67.31,86.61 67.06,86.36 L605.2
AGND  (via drill 0.35)
  Top 0.508: C602.2 88.65,100.84 | 88.65,100.84 88.14,101.35 88.14,102.87 87.17,103.83 C630.2 | 88.65,100.84 88.34,100.53 88.34,99.03 87.38,98.07 R601.1 | C603.1 71.68,99.06 | R603.1 72.64,98.55 72.14,99.06 71.68,99.06 | 71.68,99.06 71.68,101.73 73.41,103.46 C631.1
  Top 1.016: C601.1 78.99,103.63 78.99,86.61 | 78.99,86.61 C604.2 | 78.99,86.61 C605.1
  Bottom 1.016: C217.+ 52.24,42.5 C216.2 | C213.+ 55.71,13.21 C212.2
  other vias: 57.4,126.75 56.64,124.71 56.64,123.7
  pour Bottom (isolate 0.61): 54.1,48.51 54.1,0 102.36,0 102.36,129.79 58.42,129.79 56.39,129.79 54.61,129.79 54.36,129.79 54.1,129.79
  pour Top (isolate 2.184): 54.1,48.51 54.1,0 102.36,0 102.36,129.79 58.42,129.79 56.39,129.79 54.61,129.79 54.36,129.79 54.1,129.79
  pour Top: 94.49,33.27 101.6,33.27 101.85,33.02 103.38,31.5 101.6,31.5 97.54,27.43 94.49,27.43
  pour Top (no thermals): 54.36,124.46 54.36,123.44 55.88,123.44 56.13,123.19 57.15,123.19 57.66,123.7 57.66,124.21 57.66,124.71 57.66,124.97 57.15,125.48 56.13,125.48 55.88,125.22 54.36,125.22
BAL_LF
  Top 0.305: U300.1 86.36,32.77 93.47,39.88 VR400.1
BAL_LV
  Top 0.305: VR200.1 52.07,30.23 56.39,25.91 U205.1
BAL_RF
  Top 0.305: U301.1 86.36,61.72 93.22,68.58 VR401.1
BAL_RV
  Top 0.305: U206.1 56.39,55.37 52.07,59.69 VR201.1
BCK
  Top 0.203: R105.2 9.61,55.5 U1.3
BCK_OUT_ISO
  Top 0.203: U1.14 25.27,55.5 28.96,59.18 28.96,65.28 30.99,67.31 33.27,67.31 33.91,66.67 | 33.91,66.67 34.54,66.04 34.54,51.31 | 34.54,51.31 U200.1 | U201.1 32,64.77 33.91,66.67 | 34.54,51.31 34.54,36.07 | 34.54,36.07 U202.1 | 34.54,36.07 34.54,20.83 U203.1
COM_LF
  Top 0.305: U300.5 95.5,21.84 96.27,21.08 C410.2
COM_LV
  Top 0.305: C218.2 61.72,32.34 61.72,21.84 U205.5
COM_RF
  Top 0.305: U301.5 95.76,50.55 96.27,50.04 C411.2
COM_RV
  Top 0.305: U206.5 61.72,51.31 61.72,61.8 C219.2
COMP/BAL_LF
  Top 0.305: VR400.3 93.98,33.43 U300.8 92.46,27.94 92.46,26.42 93.22,25.65 95,25.65 95.76,24.89 C410.1
COMP/BAL_LV
  Top 0.305: VR200.3 57.15,32.77 C218.1 61.47,37.08 65.02,37.08 66.04,36.07 66.04,34.54 62.99,31.5 62.99,28.19 U205.8
COMP/BAL_RF
  Top 0.305: U301.8 93.98,58.42 | 93.98,58.42 93.98,62.38 VR401.3 | 93.98,58.42 92.48,56.92 92.48,55.22 93.37,54.33 95.02,54.33 95.76,53.59 C411.1
COMP/BAL_RV
  Top 0.305: VR201.3 57.15,62.23 C219.1 61.47,66.55 65.02,66.55 66.04,65.53 66.04,64.26 63.5,61.72 63.5,57.15 U206.8
DAC
  Top 0.508: U504.1 34.42,83.78 34.25,83.61 | 34.25,83.61 R509.2 | 34.25,83.61 32.81,83.61 32,82.8 L502.2 32.02,79.98 32.84,79.98 33.07,79.76 C508.1
DGND_P  (via drill 0.3, 0.35)
  Top 0.508: U501.3 8,88.01 v8.13,88.14 | U501.6 8,88.27 v8.13,88.14 | C503.2 12.17,83.01 12.27,83.01 12.7,83.44 12.7,85.85 10.41,88.14 v8.13,88.14 | U502.3 20.19,88.01 v20.32,88.14 | v22.35,94.49 22.95,93.89 R505.1 24.13,91.53 24.13,88.14 | C505.2 23.37,82.04 24.13,82.8 24.13,88.14 | C504.2 12.19,95.5 13.46,94.23 11.68,92.46 11.01,92.46 R502.1 | v20.32,88.14 24.13,88.14 | 1.52,86.87 2.79,88.14 | L503.2 1.52,97.94 C500.2 | v20.32,88.14 U502.EPAD 20.19,88.77 U502.6
  other vias: 6.6,88.14 22.35,96.27 23.37,95.25 18.8,88.14 24.13,124.21 24.64,122.17 3.81,88.14 10.92,88.14 16.26,88.14 23.11,88.14
  pour Bottom (isolate 0.61): 1.02,81.79 23.88,81.79 23.88,129.79 8.89,129.79 8.89,121.67 8.89,121.16 0,121.16 0,81.79
  pour Top (isolate 1.422, no thermals): 1.02,81.79 23.88,81.79 23.88,129.79 8.89,129.79 8.89,121.67 8.89,121.16 0,121.16 0,81.79
  pour Top: 21.34,96.77 23.11,96.77 23.88,96.01 23.88,94.49 23.11,93.73 21.34,93.73
  pour Top: 23.88,128.52 26.67,128.52 26.67,120.9 23.88,120.9
  pour Bottom: 23.88,128.52 26.67,128.52 26.67,120.9 23.88,120.9
DGND_S  (via drill 0.35)
  Top 0.305: U$100.17 21.97,25.02 v22.61,24.38 | v24.38,24.38 25.16,24.38 L103.1
  Top 0.508: C100.2 6.7,30.8 C103.2 7.41,30.1 U$100.8 | v1.52,79.5 L503.1 | C623.2 7.31,63.1 C622.2 9.87,63.1 U603.4 | U603.2 U603.1 | U1.2 9.13,56.77 C126.1 8.84,56.96 C124.2 5.52,56.96 v5.33,57.15 | U1.8 11.25,48.34 v11.18,48.26
  Top 1.016: v3.56,30.23 4.13,30.8 C100.2
  other vias: 4.57,56.64 5.33,56.13 2.54,30.73 2.54,29.72 10.16,48.26 10.67,47.5 17.27,40.39 6.86,38.1 5.33,38.1 3.81,38.1 4.83,40.13 6.1,40.13 15.75,37.08 15.75,35.81 17.53,43.69 16.51,42.67 16.26,43.94 15.75,30.23 15.75,29.21 15.75,28.19 15.75,24.64 14.48,22.61 5.59,23.88 14.73,33.78 7.11,61.47
  pour Bottom (isolate 0.406, rank 2): 12.19,46.23 12.19,80.52 0,80.52 0,20.83 26.67,20.83 26.67,43.69 24.13,46.23
  pour Top (isolate 1.27, rank 2): 12.19,48.01 12.19,80.52 0,80.52 0,20.83 26.67,20.83 26.67,43.69 22.35,48.01
DOUT
  Top 0.203: U1.4 12.35,54.23 12.7,53.88 12.7,48.09 R106.2
DOUT_OUT_ISO
  Top 0.203: 25.91,54.23 26.04,54.23 30.73,58.93 U201.3 | 25.91,54.23 U1.13 | 25.91,54.23 29.72,50.42 29.72,45.97 | U203.3 29.72,15.49 29.72,30.73 | 29.72,45.97 29.72,30.73 | U200.3 29.72,45.97 | U202.3 29.72,30.73
FILTER
  Top 0.305: U$100.20 22.31,28.83 R107.2
GND_DAC_P  (via drill 0.3, 0.35)
  Top 0.508: C507.2 37.83,95.76 38.86,95.76 39.2,95.42 R508.1 v40.64,92.71 | U504.6 36.96,88.01 v37.08,87.88 | U504.3 36.96,86.49 v35.56,87.88 | C508.2 41.4,79.76 41.91,80.26 41.91,83.06 41.4,83.57 R510.1 | L504.2 30.73,105.05 C506.2
  other vias: 39.62,95.5 39.88,87.88 32.77,87.88 30.23,124.21 29.46,122.17
  pour Top (isolate 1.422, no thermals): 30.23,79.76 44.2,79.76 44.2,129.79 30.23,129.79
  pour Bottom (isolate 0.61): 30.23,79.76 44.2,79.76 44.2,129.79 30.23,129.79
  pour Top: 27.69,128.52 30.73,128.52 30.73,120.9 27.69,120.9
  pour Bottom: 27.69,128.52 30.23,128.52 30.23,120.9 27.69,120.9
GND_DAC_S  (via drill 0.35)
  Top 0.508: v30.73,77.22 L504.1
  Bottom 1.016: C204.2 42.73,51.39 C205.2 | C202.2 42.73,36.15 C203.2 | C208.2 42.73,20.91 C207.2 | C206.2 42.73,5.67 C209.2
  pour Top (isolate 1.27): 30.23,78.74 30.23,4.57 44.2,4.57 44.2,78.74
  pour Bottom (isolate 0.61): 30.23,78.74 30.23,4.57 44.2,4.57 44.2,78.74
GND_ISO  (via drill 0.35)
  Top 0.203: 19.94,49.15 U1.9 22.23,49.15 v22.61,49.53
  Top 0.508: L603.2 25.06,62.99 C621.2 | U1.15 20.99,57.01 C127.1 | v25.65,57.66 25.21,57.22 C125.2
  other vias: 25.15,61.47 23.88,61.47
  pour Top (isolate 0.61): 18.8,67.82 18.8,48.26 25.4,48.26 26.42,49.28 26.42,59.69 27.18,60.45 27.18,67.82
  pour Bottom (isolate 0.254, rank 6): 27.18,67.82 18.03,67.82 18.03,48.26 25.4,48.26 26.42,49.28 26.42,59.69 27.18,60.45
GND_VA+  (via drill 0.35)
  Top 0.508: U$100.21 22.06,30.1 C120.2 23.98,30.39 C121.2 24.45,30.73
  other vias: 25.91,31.24 25.65,27.18
  pour Top (isolate 0.61): 18.54,29.46 20.83,29.46 20.83,26.16 26.42,26.16 26.67,26.42 26.67,32.77 25.91,33.53 21.34,33.53 20.83,33.02 20.83,31.75 18.54,31.75
  pour Bottom (isolate 0.61): 18.8,29.46 21.08,29.46 21.08,26.16 26.67,26.16 26.92,26.42 26.92,32.77 26.16,33.53 21.59,33.53 21.08,33.02 21.08,31.75 18.8,31.75
LEFT_FIL
  Top 0.305: R402.2 84.5,40.64 C401.2 87.88,40.13 90.17,42.42 97.28,42.42 99.06,40.64 99.06,38.35 98.3,37.59 94.23,37.59 90.17,33.53 90.17,26.67 92.46,24.38 | 92.46,24.38 U300.6 | R403.1 92.46,17.27 92.46,24.38
LRCK
  Top 0.203: R104.2 9.61,52.96 U1.5
LRCK_OUT_ISO
  Top 0.203: U1.12 24.77,52.96 28.19,49.53 28.19,8.64 30.23,6.6 31.75,6.6 33.27,8.13 33.27,14.48 U203.2 30.99,16.76 30.99,22.1 33.02,24.13 33.02,29.97 U202.2 30.99,32 30.99,37.34 33.02,39.37 33.02,45.21 U200.2 30.99,47.24 30.99,52.58 33.02,54.61 33.02,60.45 U201.2
M0  (via drill 0.35)
  Top 0.203: v17.78,32.51 19.63,32.51 U$100.23
  Bottom 0.203: R134.1 17.53,32.77 v17.78,32.51 17.78,32 17.53,31.75 R135.1
M1  (via drill 0.35)
  Top 0.203: v17.78,33.78 19.63,33.78 U$100.24
  Bottom 0.203: R133.1 v17.78,33.78 17.78,34.54 17.53,34.8 R132.1
M2  (via drill 0.35)
  Top 0.203: v17.78,26.16 17.91,26.29 U$100.18
  Bottom 0.203: R130.1 17.27,26.67 v17.78,26.16 17.27,25.65 R131.1
N$1
  Top 0.305: R107.1 22.68,27.09 C104.1
N$2
  Top 0.203: R104.1 6.6,52.32 6.1,51.82 6.1,49.28 12.7,42.67 12.7,23.37 10.67,21.34 8.64,21.34 7.87,22.1 7.87,25.65 8.51,26.29 U$100.11
N$3
  Top 0.305: U206.3 53.09,50.29 43.94,59.44 R202.2 43.43,59.94 41.91,61.47 U201.7 38.35,60.2 38.35,53.09 40.89,50.55 40.89,47.5 U200.7 38.35,44.96 38.35,37.59 40.84,35.11 40.84,32.2 U202.7 38.35,29.72 38.35,21.59 41.15,18.8 41.15,16.76 40.13,15.75 U203.7 37.59,13.72 37.59,5.08 39.62,3.05 50.55,3.05 59.44,11.94 59.44,19.05 U205.3
N$4
  Top 0.203: U$100.12 11.05,25.02 11.43,25.4 11.43,41.4 4.57,48.26 4.57,53.09 6.35,54.86 R105.1
N$5
  pour Bottom (isolate 1.27): 9.4,0 23.11,0 23.11,18.8 9.4,18.8
N$6
  Top 0.203: U101.1 20.8,39.65 20.14,38.99 19.81,38.99 U$100.28
N$7
  Top 1.016: U600.1 80.95,107.7 95.5,107.7 98.04,110.24 | 98.04,110.24 C600.1 | C602.1 96.15,100.84 | 96.15,100.84 D600.1 98.04,110.24 | 96.15,100.84 96.15,98.19 95.76,97.79 91.44,97.79 90.36,96.71 U601.1
N$8
  Top 0.203: J100.1 15.49,6.86 T100.1
N$9
  Top 0.203: U101.2 22.35,40.8 R108.2
N$10
  Top 0.203: D100.1 21.84,43.25 21.84,42.76 R108.1
N$11
  Top 1.016: C630.1 84.58,98.35 D601.2 85.14,95.82 R601.2 R600.2 89.22,93.66 90.36,92.52 U601.3
N$12
  Top 0.305: R400.1 R401.2 | R401.2 84.07,37.59 R402.1 | R401.2 82.3,41.91 84.84,41.91 C400.1
N$13
  Top 0.305: U203.8 36.83,21.08 36.83,30.73 | 36.83,45.97 36.83,61.21 U201.8 42.16,64.01 53.34,52.83 U206.2 58.93,54.1 58.93,57.4 58.42,57.91 | 36.83,45.97 36.83,30.73 | U200.8 36.83,45.97 | U202.8 36.83,30.73 | R201.1 58.42,57.91 | C201.1 59.69,59.18 58.42,57.91
N$14
  Top 0.305: R411.1 R412.2 | R412.2 84.07,66.29 R413.1 | C420.1 86.36,69.34 84.84,70.87 82.3,70.87 81.03,69.6 R412.2
N$15
  Top 0.305: J300.1 73.15,9.65 R403.2
N$16
  Top 0.305: U201.6 41.66,58.93 43.43,57.15 43.43,47.5 | U200.6 43.43,47.5 | 43.43,47.5 43.43,32.26 | U202.6 43.43,32.26 | 43.43,17.02 U203.6 | 43.43,32.26 43.43,17.02 | R200.1 57.91,28.45 | 57.91,28.45 58.93,27.43 58.93,24.64 U205.2 51.31,17.02 43.43,17.02 | C200.1 59.69,30.23 57.91,28.45
N$17
  Top 0.203: U1.10 23.74,50.42 R109.1
N$18
  Top 0.305: J301.1 93.73,9.65 R407.2
N$19
  Top 1.016: J600.1 77.47,123.44 U600.4
N$20
  Top 0.508: U603.6 21.07,64.14 C620.1 | C620.1 22.23,64.4 L602.1 | U603.8 20.95,66.67 21.34,66.29 C620.1
N$21
  Top 1.016: U600.3 82.55,122.58 J600.3
N$22
  Top 0.508: L603.1 22.48,63.1 C620.2 21.1,62.87 U603.5 19.18,62.87 18.54,63.5 18.54,65.02 18.92,65.41 U603.7
N$23
  Top 1.016: J500.2 18.8,123.88 18.8,120.9 18.01,120.12 U500.2
N$24
  Top 1.016: J500.1 13.46,124.21 13.46,118.11 12.95,117.6 11.29,117.6 U500.4
N$25
  Top 0.508: U501.8 5.46,92.42 R501.1 | U502.8 17.65,92.42 R504.1
  Top 1.016: C504.1 4.83,95.5 4.32,96.01 | 16.26,96.27 17.02,95.5 C501.1 | 16.26,105.16 16.26,96.27 | 16.26,96.27 16.26,93.22 16.76,92.71 R504.1 | 4.32,96.01 4.32,93.22 4.83,92.71 R501.1 | U500.1 17.69,117.62 18.2,117.11 18.2,107.1 C500.1 16.26,105.16 | 4.32,96.01 4.32,97.41 12.06,105.16 16.26,105.16
N$27
  Top 0.508: R502.2 9.27,92.5 U501.5
  Top 1.016: R501.2 R502.2
N$29
  Top 0.508: U502.5 21.46,92.5 R505.2
  Top 1.016: R504.2 R505.2
N$30
  Top 1.016: J501.2 40.89,123.88 40.89,121.16 39.86,120.12 U503.2
N$31
  Top 1.016: J501.1 35.56,124.21 35.56,118.62 34.56,117.62 U503.4
N$32
  Top 0.508: U504.8 34.42,92.5 R507.1
  Top 1.016: 33.27,95.25 33.27,93.73 33.19,93.73 R507.1 | C507.1 33.53,95.5 33.27,95.25 | U503.1 40.11,117.62 40.64,117.09 40.64,107.44 C506.1 40.13,104.9 33.27,98.04 33.27,95.25
N$33
  Top 0.305: R412.1 83.06,55.63 U301.2 87.88,57.15 C421.1
N$34
  Top 0.508: R508.2 38.23,91.99 U504.5
  Top 1.016: R507.2 R508.2
N$35
  Top 0.508: U504.2 35.69,83.78 R509.1 R510.2
N$36
  Top 1.016: U600.2 82.55,113.54 79.25,116.84 65.38,116.84 C601.2 61.82,100.99 | 61.82,100.99 63.75,99.06 C603.2 | 61.82,100.99 61.82,94.74 | 61.82,94.74 62.79,93.78 U602.2 | D602.2 60.95,95.62 61.82,94.74
N$38  (via drill 0.35)
  other vias: 51.31,127 51.82,124.71
  pour Top (no thermals): 47.24,129.03 53.59,129.03 53.59,123.44 52.32,123.44 50.55,125.22 48.26,125.22 47.24,126.24
  pour Bottom (no thermals): 47.24,129.03 53.59,129.03 53.59,123.44 52.32,123.44 50.55,125.22 48.26,125.22 47.24,126.24
N$39
  Top 1.016: C631.2 75.44,98.35 D603.1 74.88,95.82 R603.2 | R602.2 R603.2 | U602.3 69.72,95.82 R603.2
N$40  (via drill 0.35)
  other vias: 46.99,123.7 47.24,121.67
  pour Top (isolate 0.61, no thermals): 44.96,124.71 45.21,124.46 45.21,120.4 52.07,120.4 52.07,122.68 50.29,124.46 50.04,124.46 47.75,124.46 47.24,124.97 44.96,124.97
  pour Bottom (isolate 0.61, no thermals): 44.96,124.71 45.21,124.46 45.21,120.4 52.07,120.4 52.07,122.68 50.29,124.46 50.04,124.46 47.75,124.46 47.24,124.97 44.96,124.97
N$42
  Top 0.305: VR200.2 59.33,38.25 R203.1
N$43
  Top 0.305: VR201.2 59.33,67.72 R204.1
N$44
  Top 0.305: R408.1 104.9,38.1 104.14,37.34 VR400.2
N$45
  Top 0.305: R409.1 104.65,66.55 104.14,66.04 VR401.2
N$46
  Top 0.305: R401.1 83.06,26.92 U300.2 87.88,28.45 C401.1
RIGHT_FIL
  Top 0.305: R413.2 87.46,65.96 C421.2 87.88,69.09 89.92,71.12 97.03,71.12 99.06,69.09 99.06,67.56 97.79,66.29 93.98,66.29 89.92,62.23 89.92,55.63 92.46,53.09 U301.6 95.25,51.82 99.57,51.82 108.46,42.93 108.46,12.7 R407.1
RXN
  Top 0.203: U$100.10 9.58,27.69 9.14,27.69 8.55,27.09 R100.1 7.03,27.01 C102.1 4.99,26.92 4.57,26.92 3.56,25.91 3.56,20.57 7.11,17.02 T100.4
RXP
  Top 0.203: T100.6 9.14,11.94 2.29,18.8 2.29,26.67 4.41,28.79 R100.2 9.66,28.79 U$100.9
SDATA_OUT
  Top 0.203: R106.1 14.48,44.62 14.48,40.89 19.05,36.32 19.63,36.32 U$100.26
V_LEFT
  Top 0.305: C200.2 64.69,29.29 R200.2 66.55,27.43 66.55,25.4 65.79,24.64 64.26,24.64 63.5,23.88 63.5,22.1 64.77,20.83 U205.6 70.61,20.83 77.98,28.19 R400.2
V_RIGHT
  Top 0.254: U206.6 63.75,51.82 63.75,53.34 64.52,54.1 66.04,54.1 66.8,54.86 66.8,56.64 R201.2
  Top 0.305: C201.2 64.69,58.75 R201.2 | U206.6 71.12,50.29 77.98,57.15 R411.2
VA+_5V
  Top 0.508: U502.2 U502.1 15.06,85.41 14.22,84.58 14.22,83.06 | L501.2 14.22,83.06 | 14.22,83.06 15.24,82.04 C505.1
VA+_5V_RX
  Top 0.508: U$100.22 21.46,31.37 22.19,32.09 C120.1 23.78,32.09 C121.1 25.4,33.72 25.4,43.43 23.11,45.72 18.8,45.72 14.22,50.29 L501.1
VDD+12_FIL
  Top 0.508: U301.7 96.01,55.63 C407.1 96.52,55.63 97.79,55.63 C406.+ 101.85,59.69 R409.2 105.92,59.69 107.7,61.47 107.7,71.37 104.14,74.93 L600.1
  Bottom 0.508: C406.+ 106.43,52.58 106.43,32.51 R408.2 101.09,27.18 100.08,27.18 | 100.08,27.18 C424.1 94.23,27.18 U300.7 | C425.+ 100.58,27.69 100.08,27.18
VDD+12_IV
  Top 0.508: L601.1 91.44,78.49 88.9,81.03 66.04,81.03 62.99,77.98 62.99,74.42 R204.2 74.17,63.25 74.17,57.15 C214.+ 69.85,52.83 C215.1 U206.7
  Bottom 0.508: 73.66,36.83 73.66,54.1 C214.+ | 73.66,36.83 73.66,27.18 C210.+ 69.85,23.37 C211.1 U205.7 | R203.2 72.14,38.35 73.66,36.83
VDD-12_FIL
  Top 0.508: 84.58,50.55 82.3,50.55 80.01,48.26 C402.- | 84.58,50.55 U301.4 | C422.- 82.8,21.84 84.33,21.84 C423.1 84.84,21.84 U300.4 | C403.1 84.58,50.55
  Bottom 0.508: C402.- 79.25,47.75 76.2,44.7 | 76.2,44.7 76.2,22.86 C422.- | 76.2,44.7 76.2,65.53 L605.1
VDD-12_IV
  Top 0.508: C217.- 53.59,45.21 C216.1 56.13,47.75 U206.4 | C213.- 53.09,15.24 C212.1 56.13,18.29 U205.4
  Bottom 0.508: L606.1 56.9,75.18 53.34,71.63 53.34,46.99 C217.- 50.29,43.94 50.29,39.88 53.34,36.83 53.34,17.02 C213.-
VDD_5V_RX  (via drill 0.35)
  Top 0.508: U$100.7 7.83,31.37 C103.1 6.5,32.7 C100.1 3.88,32.7 2.29,34.29 2.29,40.89 | 2.29,40.89 2.29,59.18 | 2.29,59.18 2.29,65.02 | U1.1 9.16,58.04 C126.2 8.34,58.86 C124.1 2.61,58.86 2.29,59.18 | U603.3 8.9,64.14 C622.1 7.31,64.4 C623.1 2.71,64.6 2.29,65.02 | v20.07,43.69 D100.2 | v17.53,23.62 17.65,23.75 U$100.16 | 2.29,40.89 v2.54,40.64 | L500.1 2.79,79.77 2.29,79.26 2.29,65.02
  Bottom 0.508: R130.2 14.99,26.67 13.97,27.69 | R132.2 13.97,34.8 | 13.97,34.8 13.97,32.77 | 13.97,32.77 13.97,27.69 | R134.2 13.97,32.77 | 13.97,34.8 13.97,39.12 | v20.07,43.69 19.05,43.69 14.48,39.12 13.97,39.12 | 13.97,27.69 13.97,25.15 15.49,23.62 v17.53,23.62 | v2.54,40.64 4.06,39.12 13.97,39.12
VDD_DAC  (via drill 0.35)
  Top 0.508: L502.1 32.26,78.25 v32.26,77.22
  Bottom 0.508: 47.5,23.62 47.5,11.94 C206.1 45.21,10.67 C209.1 U203.5 | 47.5,23.62 47.5,38.86 | 47.5,38.86 47.5,54.1 | 47.5,54.1 47.5,70.87 43.94,74.42 35.05,74.42 v32.26,77.22 | 47.5,23.62 C208.1 45.21,25.91 C207.1 U202.5 | 47.5,38.86 C202.1 45.21,41.15 C203.1 U200.5 | 47.5,54.1 C204.1 45.21,56.39 C205.1 U201.5

## Text on the board
tPlace: CS8412 4xTDA1543A / / Designed By / Kheng Choong